# EAGLE board nrf51_hid_joy (EAGLE 7.1.0)
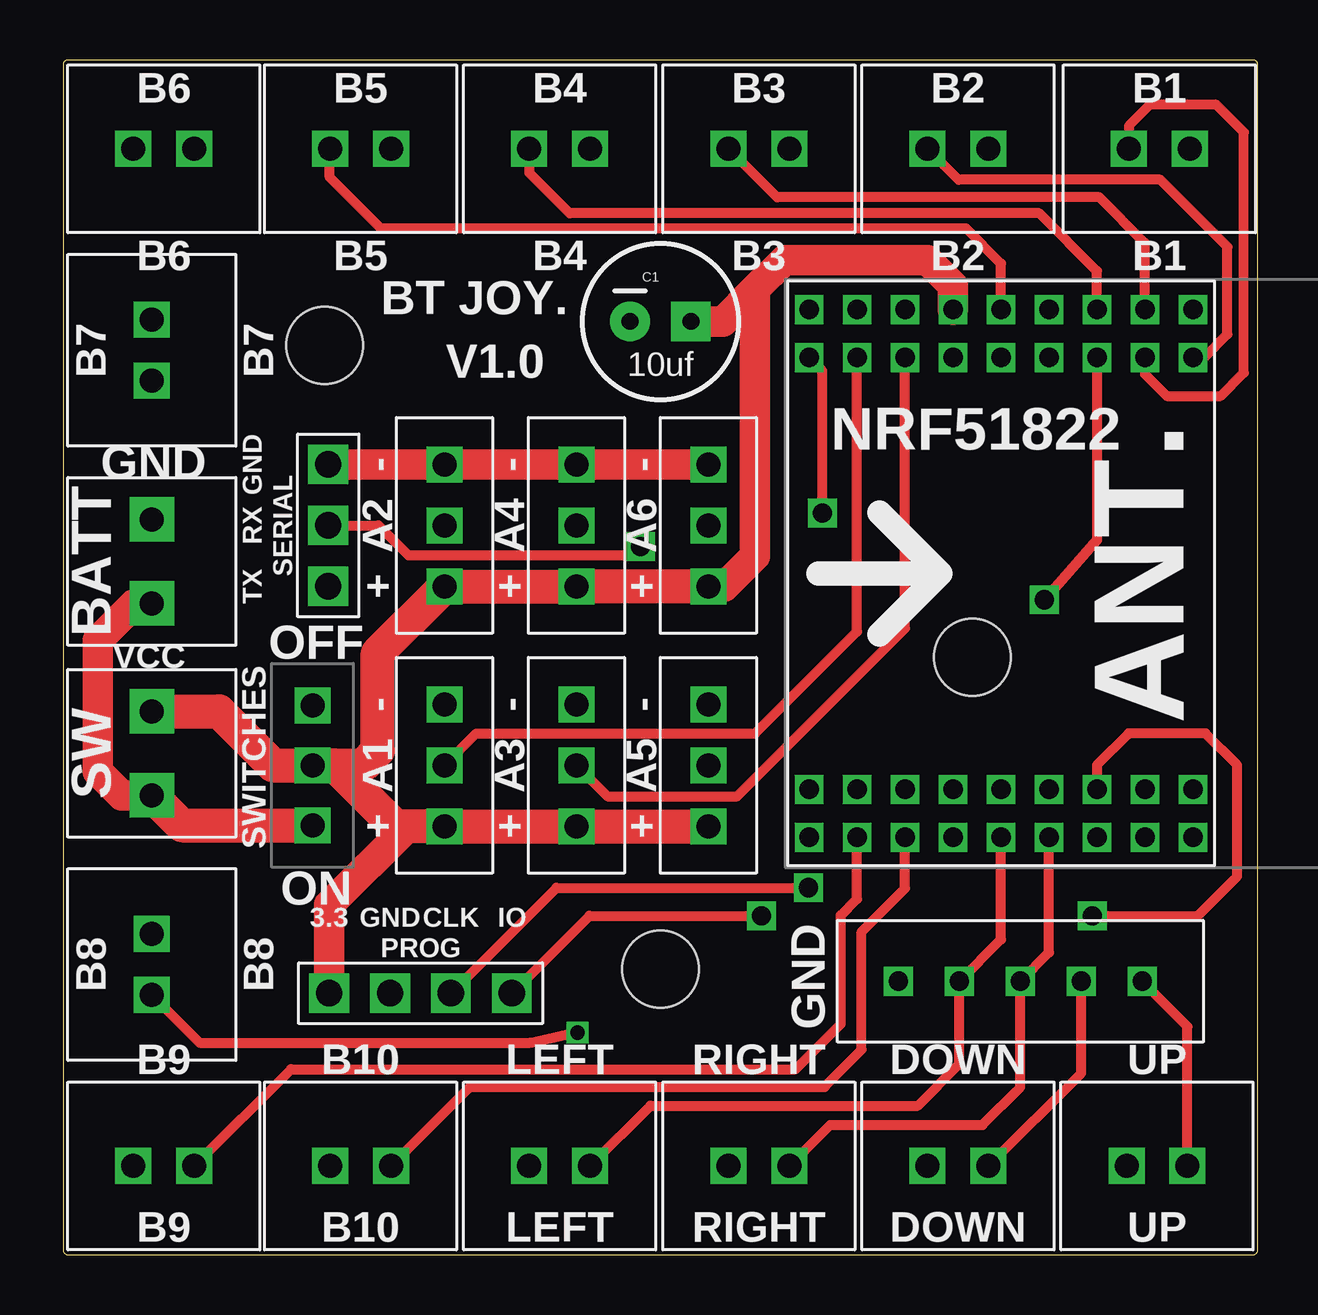
[diagram p0: board, top side]
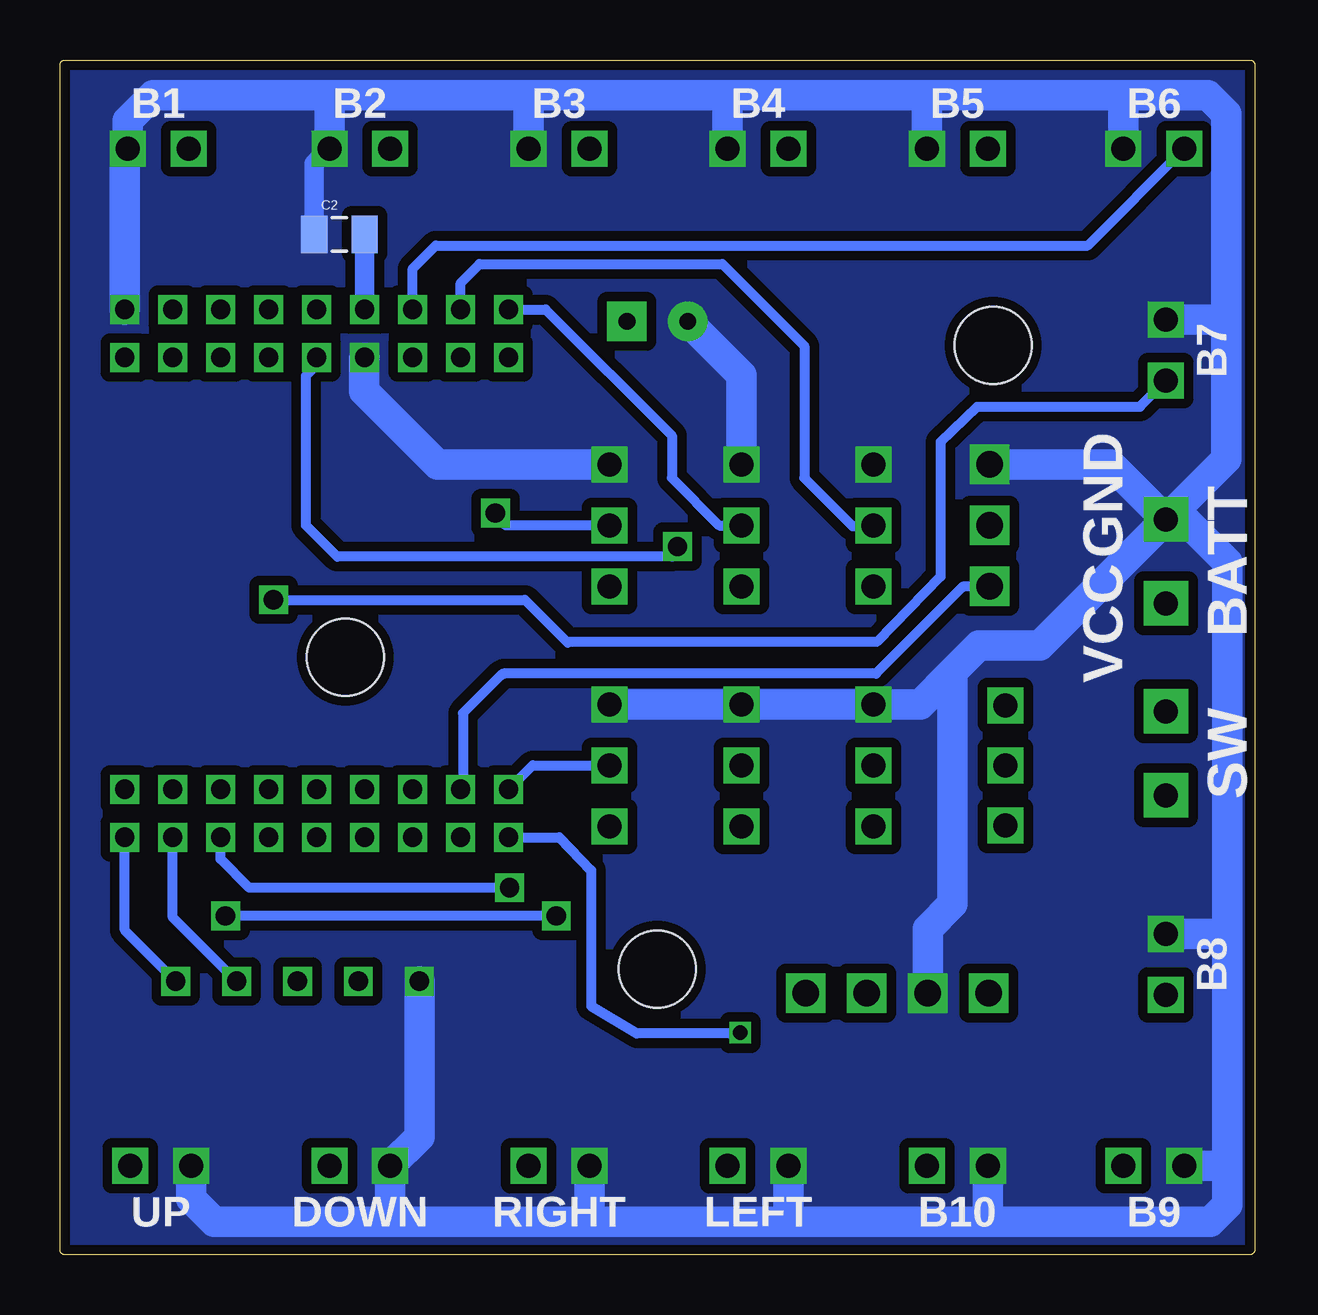
[diagram p1: board, bottom side, seen from below]

Size 49.8 x 49.8 mm. Coordinates in mm from the lower left corner, seen from the top.
Outline: 0,49.6 0,0.2 arc90 0.2,0 49.6,0 arc90 49.8,0.2 49.8,49.6 arc90 49.6,49.8 0.2,49.8 arc90 0,49.6
Copper layers (1*2*15*16): Top 0.035mm / dielectric 0.2mm / layer 2 0.0175mm / dielectric 1.1mm / layer 15 0.0175mm / dielectric 0.2mm / Bottom 0.035mm
Design rules "SeeedStudio_DRU_no_angle_20130527": minimum track width 6mil, minimum drill 12mil, track to track 6mil, track to pad 6mil, pad to pad 6mil, via to via 6mil, smd to smd 0mil, copper to edge 10mil, drill to drill 10mil, minimum pad ring 6mil, minimum via ring 6mil, stop-mask expansion 2mil, vias tented up to drill 25mil, thermal gap 10mil
Holes 3.2 mm at 10.9,37.9 24.9,11.9 37.9,24.9

## Footprints (pad centres in the part's own frame; a part is rotated, then mirrored left to right if it is on the bottom)
ANALOG_INPUT = drill 1 square: GND 2.54,0; INPUT 0,0; VREF -2.54,0
JST254 = drill 1 square: IN1 -1.27,0; IN2 1.27,0
2P-3.5 = drill 1 pad 1.85 square: P1 -1.75,0; P2 1.75,0
CAPA-RAD-MEDIUM = drill 0.7 pad 1.651 square: 1 1.27,0 | drill 0.7 pad 1.651: 2 -1.27,0
0805 = smd 1.1 x 1.55: 1 -1.05,0; 2 1.05,0
NRF51-MODULE = drill 0.8 square: GND -11,8; GND2 -9,-2; NC -11,2; NC2 -9,2; P00 -9,-4; P01 -11,-6; P02 -9,-6; P03 -11,-8; P04 -9,-8; P05 9,-8; P06 11,-8; P07 9,-6; P08 11,-6; P09 9,-4; P10 11,-4; P11 9,-2; P12 11,-2; P13 9,0; P14 11,0; P15 9,2; P16 11,2; P17 9,6; P18 9,8; P19 11,6; P20 11,8; P21 -9,8; P22 -11,6; P23 -9,6; P24 -11,4; P25 -9,4; P28 -11,0; P29 -9,0; P30 -11,-4; SWCLK 11,4; SWDIO 9,4; VCC -11,-2
PROG_SWD = drill 1.1 square: GND -1.27,0; SWCLK 1.27,0; SWDIO 3.81,0; VCC -3.81,0
NRF51_SERIAL = drill 1.1 square: GND 2.54,0; RX 0,0; TX -2.54,0
5_PINS_CONNECTOR = drill 0.8 square: 1 -5.08,0; 2 -2.54,0; 3 0,0; 4 2.54,0; 5 5.08,0
SS-12D00G3 = drill 1 square: COMMON 0,0; P1 -2.5,0; P2 2.5,0

## Placement (x,y rotation side)
A1  A1  [ANALOG_INPUT]  15.9,20.4 90 top
A2  A2  [ANALOG_INPUT]  15.9,30.4 90 top
A3  A3  [ANALOG_INPUT]  21.4,20.4 90 top
A4  A4  [ANALOG_INPUT]  21.4,30.4 90 top
A5  A5  [ANALOG_INPUT]  26.9,20.4 90 top
A6  A6  [ANALOG_INPUT]  26.9,30.4 90 top
B1  B1  [JST254]  45.7,46.1 0 top
B2  B2  [JST254]  37.3,46.1 0 top
B3  B3  [JST254]  29,46.1 0 top
B4  B4  [JST254]  20.7,46.1 0 top
B5  B5  [JST254]  12.4,46.1 0 top
B6  B6  [JST254]  4.2,46.1 0 top
B7  B7  [JST254]  3.7,37.7 90 top
B8  B8  [JST254]  3.7,12.1 90 top
B9  B9  [JST254]  4.2,3.7 180 top
B10  B10  [JST254]  12.4,3.7 180 top
BATT  BATT  [2P-3.5]  3.7,28.9 270 top
C1  10uf  [CAPA-RAD-MEDIUM]  24.9,38.9 0 top
C2  100nf  [0805]  38.15,42.53 0 bottom
DOWN  DOWN  [JST254]  37.3,3.7 180 top
LEFT  LEFT  [JST254]  20.7,3.7 180 top
RIGHT  RIGHT  [JST254]  29,3.7 180 top
SWITCH  SW  [2P-3.5]  3.7,20.9 270 top
U$1  NRF51_MODULEBIG  [NRF51-MODULE]  39.1,28.4 270 top
U$2  NRF51_PROG  [PROG_SWD]  14.9,10.9 0 top
U$3  NRF51_SERIAL  [NRF51_SERIAL]  11.05,30.4 90 top
U$14  5_5PINS_JOY  [5_PINS_CONNECTOR]  39.9,11.4 180 top
U$23  SWITCH  [SS-12D00G3]  10.4,20.4 270 top
UP  UP  [JST254]  45.6,3.7 180 top

## Library data of the parts
A1-A6 B1-B10 BATT C1 C2 DOWN LEFT RIGHT SWITCH U$1-U$3 U$14 U$23 UP = nrf51_hid_joy

## Nets
A1: A1.INPUT U$1.P02
A2: A2.INPUT U$1.P01
A3: A3.INPUT U$1.P00
A4: A4.INPUT U$1.P03
A5: A5.INPUT U$1.P05
A6: A6.INPUT U$1.P04
B1: B1.IN1 U$1.P23
B2: B2.IN1 U$1.P21
B3: B3.IN1 U$1.P22
B4: B4.IN1 U$1.P24
B5: B5.IN1 U$1.P28
B6: B6.IN1 U$1.P30
B7: B7.IN1 U$1.P25
B8: B8.IN1 U$1.P06
B9: B9.IN1 U$1.P08
B10: B10.IN1 U$1.P10
DOWN: DOWN.IN1 U$1.P19 U$14.2
GND: A1.GND A2.GND A3.GND A4.GND A5.GND A6.GND B1.IN2 B2.IN2 B3.IN2 B4.IN2 B5.IN2 B6.IN2 B7.IN2 B8.IN2 B9.IN2 B10.IN2 BATT.P1 C1.2 C2.1 DOWN.IN2 LEFT.IN2 RIGHT.IN2 U$1.GND U$1.GND2 U$2.GND U$3.GND U$14.5 UP.IN2
LEFT: LEFT.IN1 U$1.P14 U$14.4
RIGHT: RIGHT.IN1 U$1.P16 U$14.3
RX: U$1.P29 U$3.RX
SWCLK: U$1.SWCLK U$2.SWCLK
SWDIO: U$1.SWDIO U$2.SWDIO
TX: U$1.P07 U$3.TX
UP: U$1.P20 U$14.1 UP.IN1
V_BATT: BATT.P2 SWITCH.P2 U$23.P2
VCC: A1.VREF A2.VREF A3.VREF A4.VREF A5.VREF A6.VREF C1.1 C2.2 SWITCH.P1 U$1.VCC U$2.VCC U$23.COMMON

## Tracks (layer width: path | path; a pad name or v marks a point on that pad's centre or on a via)
A1
  Top 0.406: A1.INPUT 17.22,21.72 28.85,21.72 33.1,25.97 U$1.P02
A2
  Bottom 0.406: U$1.P01 33.1,40.5 32.31,41.29 22.19,41.29 18.78,37.88 18.78,32.38 16.77,30.36 15.94,30.36 A2.INPUT
A3
  Top 0.406: A3.INPUT 22.69,19.11 28.09,19.11 35.1,26.11 U$1.P00
A4
  Bottom 0.406: U$1.P03 29.56,39.4 24.29,34.14 24.29,32.38 22.32,30.4 A4.INPUT
A5
  Bottom 0.406: U$1.P05 30.1,20.4 A5.INPUT
A6  (via drill 0.8)
  Top 0.406: v31.65,30.91 31.65,36.85 U$1.P04
  Bottom 0.406: A6.INPUT 31.21,30.39 v31.65,30.91
B1
  Top 0.406: U$1.P23 45.1,36.7 46,35.8 48.26,35.8 49.22,36.77 49.22,46.79 48.08,47.93 45.3,47.93 44.42,47.06 B1.IN1
B2
  Top 0.406: U$1.P21 47.56,37.4 48.53,38.37 48.53,42.02 45.74,44.81 37.32,44.81 B2.IN1
B3
  Top 0.406: U$1.P22 45.1,42.17 43.2,44.07 29.76,44.07 B3.IN1
B4
  Top 0.406: U$1.P24 43.1,41 40.69,43.41 21.12,43.41 19.44,45.09 B4.IN1
B5
  Top 0.406: U$1.P28 39.1,41.32 37.65,42.77 13.26,42.77 11.12,44.91 11.12,46.09 B5.IN1
B6
  Bottom 0.406: U$1.P30 35.1,41.11 34.14,42.07 6.96,42.07 B6.IN1
B7  (via drill 0.8)
  Top 0.406: U$1.P25 43.1,29.78 v40.9,27.3
  Bottom 0.406: v40.9,27.3 30.42,27.3 28.63,25.51 28.6,25.54 15.75,25.54 13.1,28.26 13.1,33.88 11.56,35.34 4.79,35.34 B7.IN1
B8  (via drill 0.6)
  Top 0.406: B8.IN1 5.69,8.84 19.47,8.84 21.28,9.25 v21.44,9.25
  Bottom 0.406: U$1.P06 28.98,17.4 27.66,16.03 27.66,10.37 25.76,9.22 21.88,9.22 v21.44,9.25
B9
  Top 0.406: B9.IN1 9.5,7.73 30.53,7.73 32.42,9.62 32.42,14.15 33.1,14.83 U$1.P08
B10
  Top 0.406: B10.IN1 16.96,7 31.74,7 33.29,8.54 33.29,13.46 35.1,15.28 U$1.P10
DOWN
  Top 0.406: DOWN.IN1 42.44,7.57 U$14.2
  Bottom 0.406: U$14.2 45.1,14.06 U$1.P19
GND
  Top 1.27: A6.GND A4.GND A2.GND U$3.GND
  Bottom 0.813: C2.1 39.2,45.47 B2.IN2
  Bottom 1.27: UP.IN2 44.33,2.32 43.38,1.37 36.03,1.37 | 36.03,1.37 27.86,1.37 | 27.86,1.37 19.36,1.37 | 19.36,1.37 11.06,1.37 | 11.06,1.37 1.84,1.37 1.14,2.07 1.14,3.66 | 1.14,3.66 1.14,13.43 | 1.14,13.43 1.14,28.87 2.92,30.65 BATT.P1 | U$1.GND 47.1,45.97 B1.IN2 46.97,47.28 45.91,48.33 38.95,48.33 | 38.95,48.33 29.93,48.33 | 29.93,48.33 21.59,48.33 | 21.59,48.33 13.47,48.33 | 13.47,48.33 5.65,48.33 | 5.65,48.33 1.96,48.33 1.19,47.56 1.19,39.2 | 1.19,39.2 1.19,33.16 BATT.P1 | BATT.P1 5.99,32.94 U$3.GND | A6.GND 34.05,32.94 37.12,36.01 37.12,37.38 U$1.GND2 | A4.GND 21.4,36.67 C1.2 | 12.6,24.28 13.95,22.94 A1.GND A3.GND A5.GND | BATT.P1 8.97,25.38 11.5,25.38 12.6,24.28 | 36.03,1.37 DOWN.IN2 34.82,4.91 U$14.5 | RIGHT.IN2 27.73,1.5 27.86,1.37 | LEFT.IN2 19.43,1.43 19.36,1.37 | U$2.GND 13.63,13.58 12.6,14.61 12.6,24.28 | B10.IN2 11.13,1.44 11.06,1.37 | B9.IN2 1.18,3.7 1.14,3.66 | B8.IN2 1.2,13.37 1.14,13.43 | B4.IN2 21.97,47.95 21.59,48.33 | B3.IN2 30.27,48 29.93,48.33 | B2.IN2 38.57,47.95 38.95,48.33 | B5.IN2 13.67,48.13 13.47,48.33 | B6.IN2 5.47,48.15 5.65,48.33 | B7.IN2 1.42,38.97 1.19,39.2
  pour Bottom (isolate 0.406, no thermals): 0.15,49.68 49.68,49.68 49.68,0.15 0.15,0.15
LEFT
  Top 0.406: LEFT.IN1 24.48,6.21 35.62,6.21 37.36,7.95 U$14.4 39.1,13.14 U$1.P14
RIGHT
  Top 0.406: RIGHT.IN1 31.98,5.41 38.33,5.41 39.9,6.99 U$14.3 41.1,12.6 U$1.P16
RX  (via drill 0.8)
  Top 0.406: U$3.RX 13.15,30.4 14.38,29.16 23.88,29.16 v24.06,29.52
  Bottom 0.406: v24.06,29.52 24.28,29.1 38.24,29.1 39.55,30.4 39.55,36.64 39.1,37.09 U$1.P29
SWCLK  (via drill 0.8)
  Top 0.406: U$2.SWCLK 20.57,15.3 v31.06,15.3
  Bottom 0.406: v31.06,15.3 41.91,15.3 43.1,16.49 U$1.SWCLK
SWDIO  (via drill 0.8)
  Top 0.406: U$2.SWDIO 21.93,14.12 v29.11,14.12 | v42.9,14.12 47.29,14.12 48.94,15.77 48.94,20.41 47.62,21.73 44.42,21.73 43.1,20.41 U$1.SWDIO
  Bottom 0.406: v29.11,14.12 v42.9,14.12
TX
  Bottom 0.406: U$3.TX 12.06,27.86 arc-45 12.21,27.8 15.79,24.22 31.27,24.22 arc-45 31.41,24.16 33,22.57 33,19.58 arc45 33.06,19.44 U$1.P07
UP
  Top 0.406: UP.IN1 46.87,9.51 U$14.1
  Bottom 0.406: U$14.1 47.1,13.52 U$1.P20
V_BATT
  Top 1.27: SWITCH.P2 2.45,19.15 1.45,20.15 1.45,25.61 2.94,27.1 3.65,27.1 BATT.P2
  Top 1.422: SWITCH.P2 4.95,17.9 U$23.P2
VCC
  Top 1.27: U$2.VCC 11.09,14.57 14.38,17.86 | 28.84,40.24 28.84,29.13 27.57,27.86 A6.VREF | 28.84,40.24 30.06,41.46 36.02,41.46 37.09,40.39 37.09,39.41 U$1.VCC | C1.1 27.5,38.9 28.84,40.24
  Top 1.422: SWITCH.P1 6.5,22.65 8.75,20.4 U$23.COMMON 11.31,20.4 | 11.31,20.4 12.51,20.4 13.12,21.01 13.12,25.07 A2.VREF A4.VREF A6.VREF | 11.31,20.4 13.85,17.86 14.38,17.86 A1.VREF A3.VREF A5.VREF
  Bottom 0.813: C2.2 U$1.VCC

## Text on the board
tPlace: BT JOY. | V1.0 | NRF51822 | GND | OFF | VCC | SWITCHES | ON | GND
bPlace: GND | VCC